# Altium PCB Subsystemintropcb.PcbDoc
Units mil, origin at the board's own origin, x right, y up, seen from the top; angles counter-clockwise.
Board outline 6000 x 4000 mil, 2 copper layers (Top Layer, Bottom Layer); 6 components, 7 nets, 21 pads, 2 vias.
Unrouted connection lines stored in the file: 4.
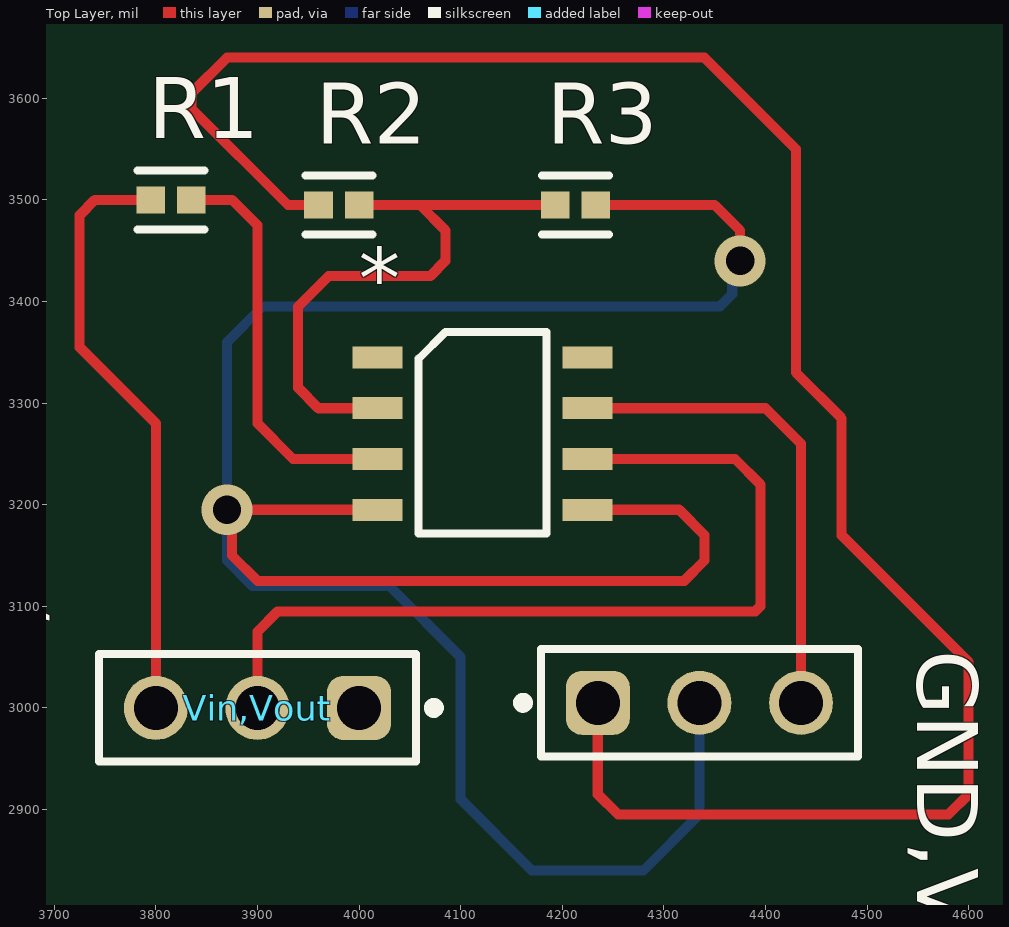
[diagram p0: Top Layer view]
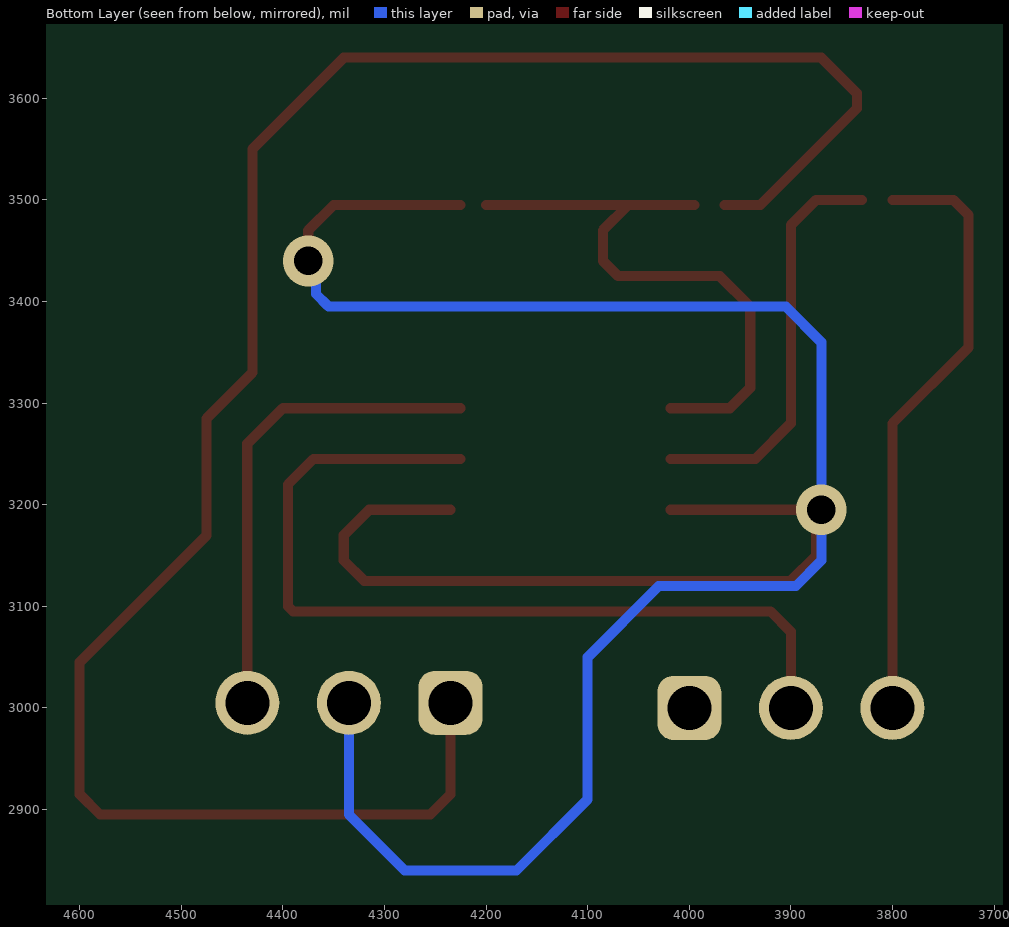
[diagram p1: Bottom Layer view, seen from below]

## Layer stack, top to bottom
Top Solder: solder mask 0.4, Solder Resist, Dk 3.5
Top Layer: signal copper 1.4
Dielectric 1: dielectric 12.6, FR-4, Dk 4.8
Bottom Layer: signal copper 1.4
Bottom Solder: solder mask 0.4, Solder Resist, Dk 3.5

## Board outline
1000,1000 7000,1000 7000,5000 1000,5000

## Design rules (kind name [scope] priority, off if disabled: settings)
Clearance [All] p1: gap=10 ignorepadtopadclearanceinfootprint=FALSE
PolygonConnect [All] p1: connectstyle=Relief reliefconductorwidth=10 reliefentries=4 polygonreliefangle="90 Angle" airgapwidth=10
RoutingVias [All] p1: holewidth=28 width=50 viastyle="Through Hole" minholewidth=28 minwidth=50 maxholewidth=28 maxwidth=50
SolderMaskExpansion [All] p1: expansion=4 istentingtop=FALSE
Width [All] p1: maxlimit=10 minlimit=10 preferedwidth=10
30 further rules are at their usual default settings.

## Components (designator, comment, footprint, x,y, rotation, side; value= is the part's Value field where it differs from the comment)
* "Component_1" PCBComponent_1 4055,3170 r0 top
GND,VCC+,VCC- "61300311121" 61300311121 4335,3005 r0 top
R1 "RC1005F103CS" FP-RC1005-IPC_A 3814.9,3500 r0 top
R2 "RC1005F103CS" FP-RC1005-IPC_A 3980.1,3495 r0 top
R3 "RC1005F103CS" FP-RC1005-IPC_A 4213.13,3495 r0 top
Vin,Vout "61300311121" 61300311121 3900,3000 r180 top

## Footprints (in the part's own frame and the unit in brackets; to place one, negate y for a bottom-side part, rotate by r counter-clockwise, add the part's x,y. Pads: shape width x height; smd on the part's side, far side on the other; paste and mask are expansions set on the pad)
61300311121 [mm] "Pin Header, pitch 2.54 mm, THT, Vertical, single row, 3p"
  rrect50% 1.6x1.6 hole 1.1: 1(-2.54,0)
  round 1.6 hole 1.1: 2(0,0) 3(2.54,0)
  silkscreen extent -4.53,-1.35 3.96,1.35, body extent -3.81,-1.27 3.81,1.27, height 8.57
FP-RC1005-IPC_A [mil]
  rect 28.16x26.48 smd paste+0 mask+0: 1(-20,0) 2(20,0)
  silkscreen extent -33,-29 33,29, body extent -41,-21 41,21, height 10
PCBComponent_1 [mm]
  rect 1.25x0.55 smd: 1(-0.932,4.445) 2(-0.932,3.175) 3(-0.932,1.905) 4(-0.932,0.635) 5(4.318,0.635) 6(4.318,1.905) 7(4.318,3.175) 8(4.318,4.445)
  round 1.016 on Top Overlay: ""(0.889,4.191)
  silkscreen extent 0.09,0.04 3.29,5.08

## Part data
GND,VCC+,VCC- Vin,Vout: library part CMP-1502-01062-3, Color=Black, Contact Resistance=20mΩ, Current Rating=3A, Max Operating Temperature=105°C, Min Operating Temperature=-40°C, Operating Supply Voltage=250V, Connector Type="Male Pin", Contact Material=Copper, Contact Mating Length=5.9944mm, Contact Plating=Gold, Gender=Male, Height=8.94mm, Lead Free="Lead Free", Lead Pitch=2.54mm, Mount="Through Hole", NexarPartId=32855521, Number of Contacts=3, Number of Pins=3, Number of Positions=3, Number of Rows=1, Orientation=Vertical, Packaging=Bulk, Pitch=2.54mm, REACH SVHC=Unknown, RoHS=Compliant, Termination=Solder, Voltage Rating=250V
R1 R2 R3: library part CMP-13261-004522-1, "Res Thick Film 0402 10kΩ 1% 0.063W ±100ppm/°C Molded SMD T/R", Case Code (Imperial)=0402, Case Code (Metric)=1005, Max Operating Temperature=155°C, Max Power Dissipation=63mW, Min Operating Temperature=-55°C, Package Quantity=1, Power Rating=62.5mW, Resistance=10kR, Temperature Coefficient=100ppm/°C, Tolerance=1%, Case/Package=0402, Composition="Thick Film", Contact Plating=Tin, Depth=0.5mm, Features="Moisture Resistant", Height=0.016inch, Length=1mm, Military Standard=Not, Mount="Surface Mount", Number of Terminations=2, Packaging="Tape and Reel", Radiation Hardening=No, Width=0.02inch

## Via types
v1: diameter 50, hole 28, Top Layer to Bottom Layer, 2 vias

## Nets (pads, with @x,y where several pads share a name; then routed paths per layer and width w, separated by ;. In a path a pad name is that pad's centre, name@x,y a point inside that pad or via, vN(x,y) a via of type N, cw(c..) or ccw(c..) an arc to the next point about the centre after c; other vN are vias at no path point)
Net*_2: *.2 R2.2 R3.1 | length 600.7
  Top Layer w10: R2.2@3995,3495 R3.1@4200.1,3495 ; *.2 3960,3295 3940,3315 3940,3395 3970,3425 4070,3425 4085,3440 4085,3470 4060,3495
Net*_3: *.3 R1.2 | length 408.4
  Top Layer w10: R1.2@3829.81,3500 3875,3500 3900,3475 3900,3280 3935,3245 *.3
Net*_4: *.4 GND,VCC+,VCC-.2
Net*_6: *.6 R3.2 Vin,Vout.2
Net*_7: *.7 GND,VCC+,VCC-.3
NetGND,VCC+,VCC-_1: GND,VCC+,VCC-.1 R2.1 | length 2008.3
  Top Layer w10: R2.1@3965.19,3495 3930,3495 3835,3590 3835,3605 3870,3640 4340,3640 4430,3550 4430,3330 4475,3285 4475,3170 4600,3045 4600,2915 4580,2895 4255,2895 4235,2915 4235,3005
NetR1_1: R1.1 Vin,Vout.3 | length 597.3
  Top Layer w10: 3800,3000 3800,3280 3725,3355 3725,3485 3740,3500 R1.1@3800,3500
pads on no net: *. *.1 *.5 *.8 Vin,Vout.1
copper on no net: | length 3943.8
  Top Layer w10: 3900,3000 3900,3075 3920,3095 4390,3095 4395,3100 4395,3220 4370,3245 4225,3245 ; 4018.31,3195 v1(3870,3195) 3875,3190 3875,3150 3900,3125 4320,3125 4340,3145 4340,3170 4315,3195 4235,3195 ; 4225,3295 4400,3295 4435,3260 4435,3005 ; 4225,3495 4350,3495 4375,3470 v1(4375,3440)
  Bottom Layer w10: 4335,3005 4335,2895 4280,2840 4170,2840 4100,2910 4100,3050 4030,3120 3895,3120 3870,3145 v1(3870,3195) 3870,3360 3905,3395 4355,3395 4355.68,3395.68 4367.35,3407.35 4367.35,3432.35 v1(4375,3440)